# Altium PCB PCB3.PcbDoc
Units mm, origin at the board's own origin, x right, y up, seen from the top; angles counter-clockwise.
Board outline 152.4 x 101.6 mm, 2 copper layers (Top Layer, Bottom Layer); 22 components, 16 nets, 90 pads, 7 vias.
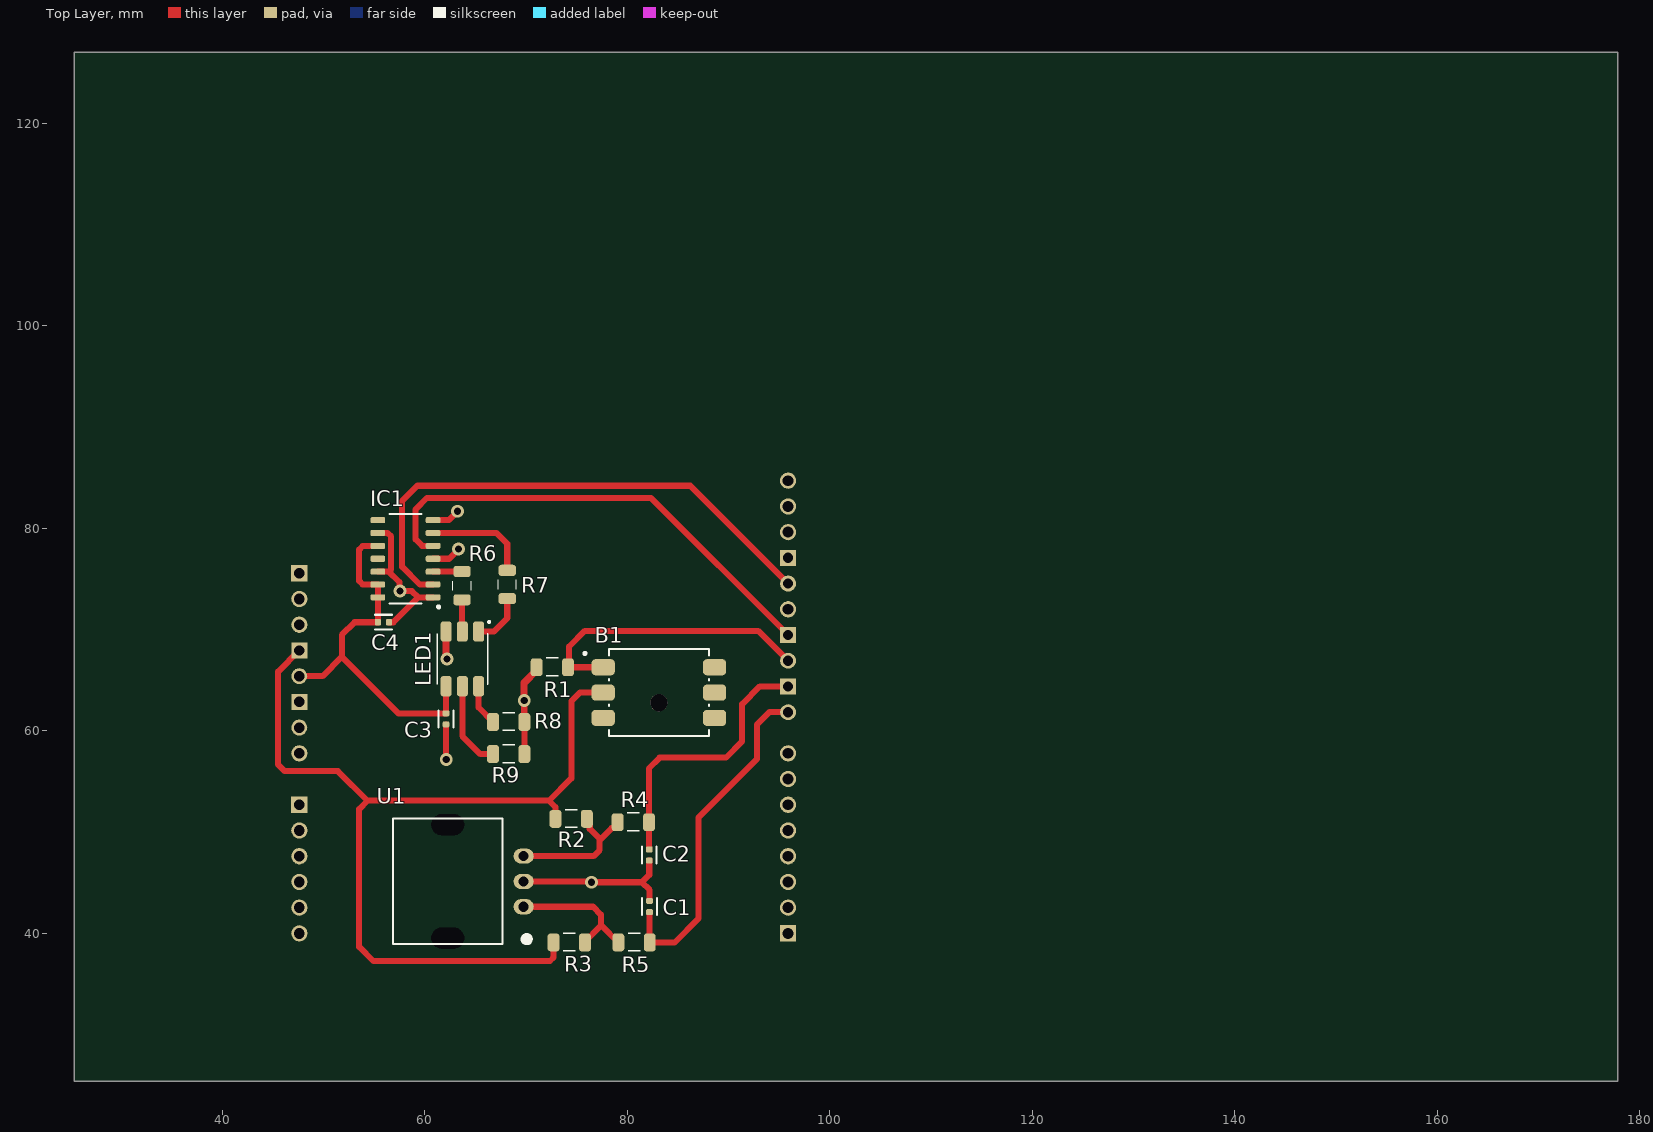
[diagram p0: Top Layer view]
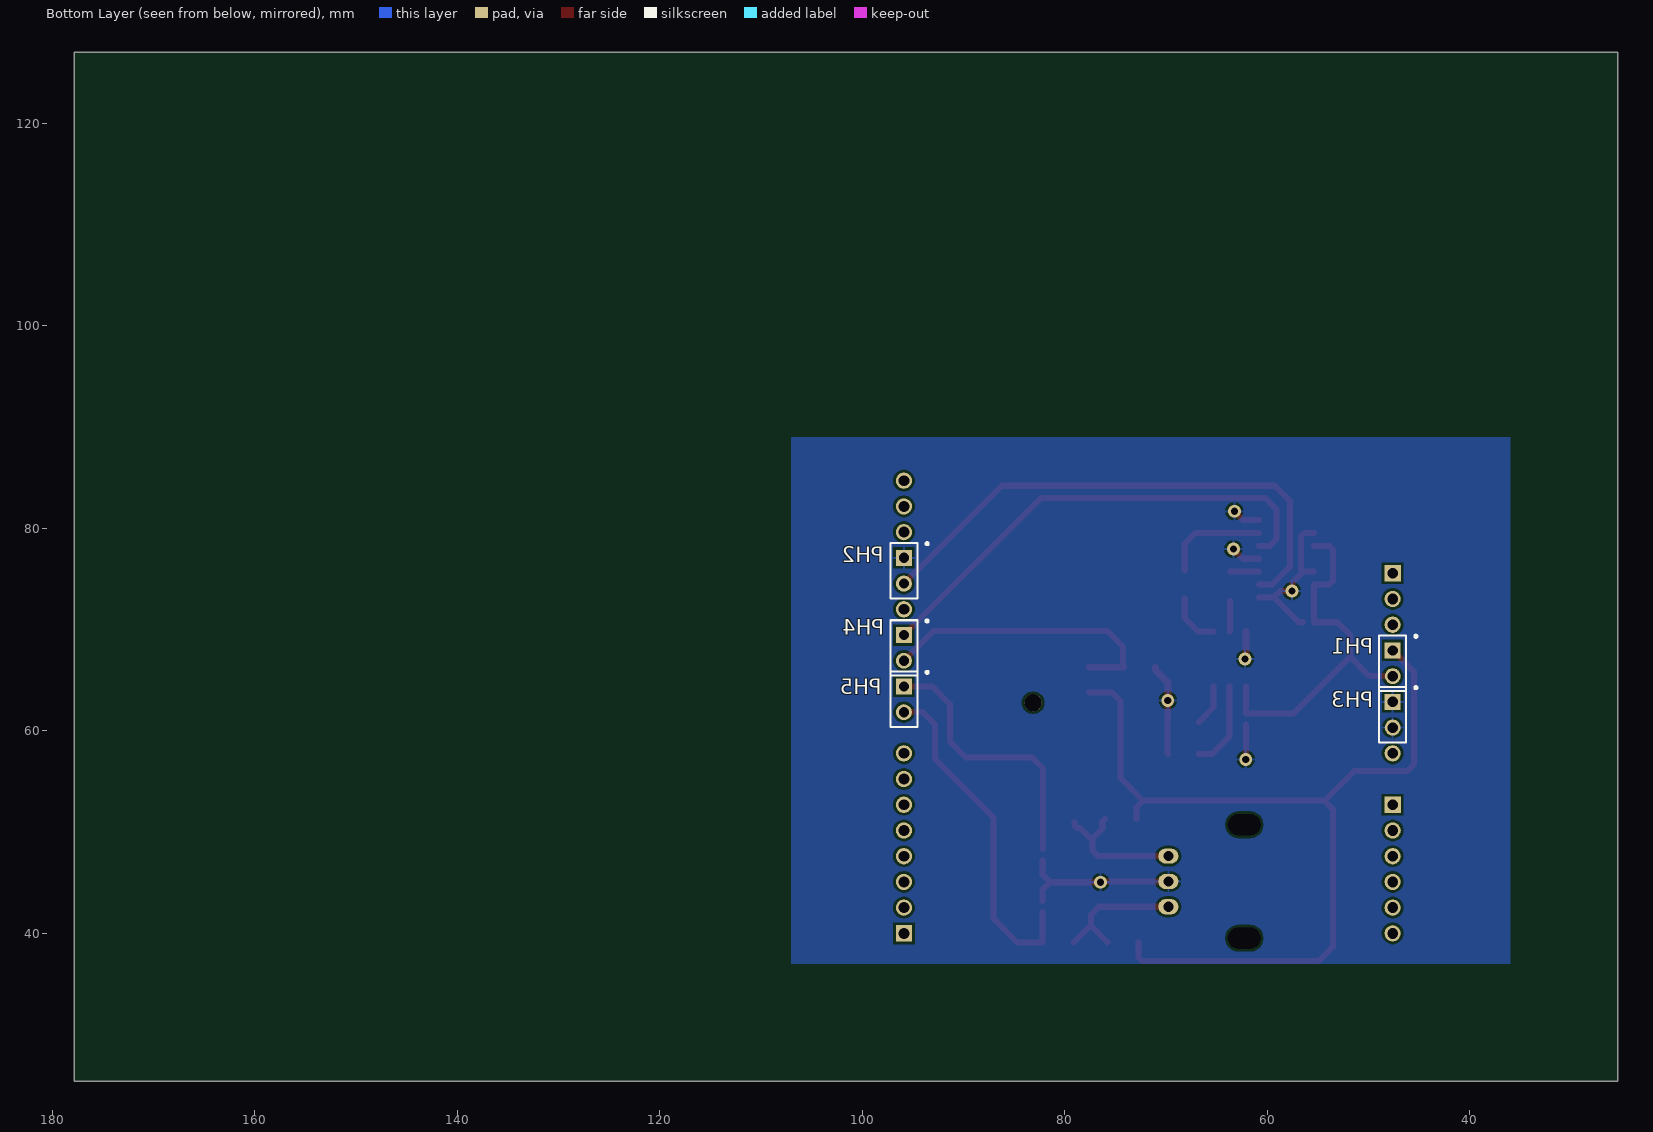
[diagram p1: Bottom Layer view, seen from below]
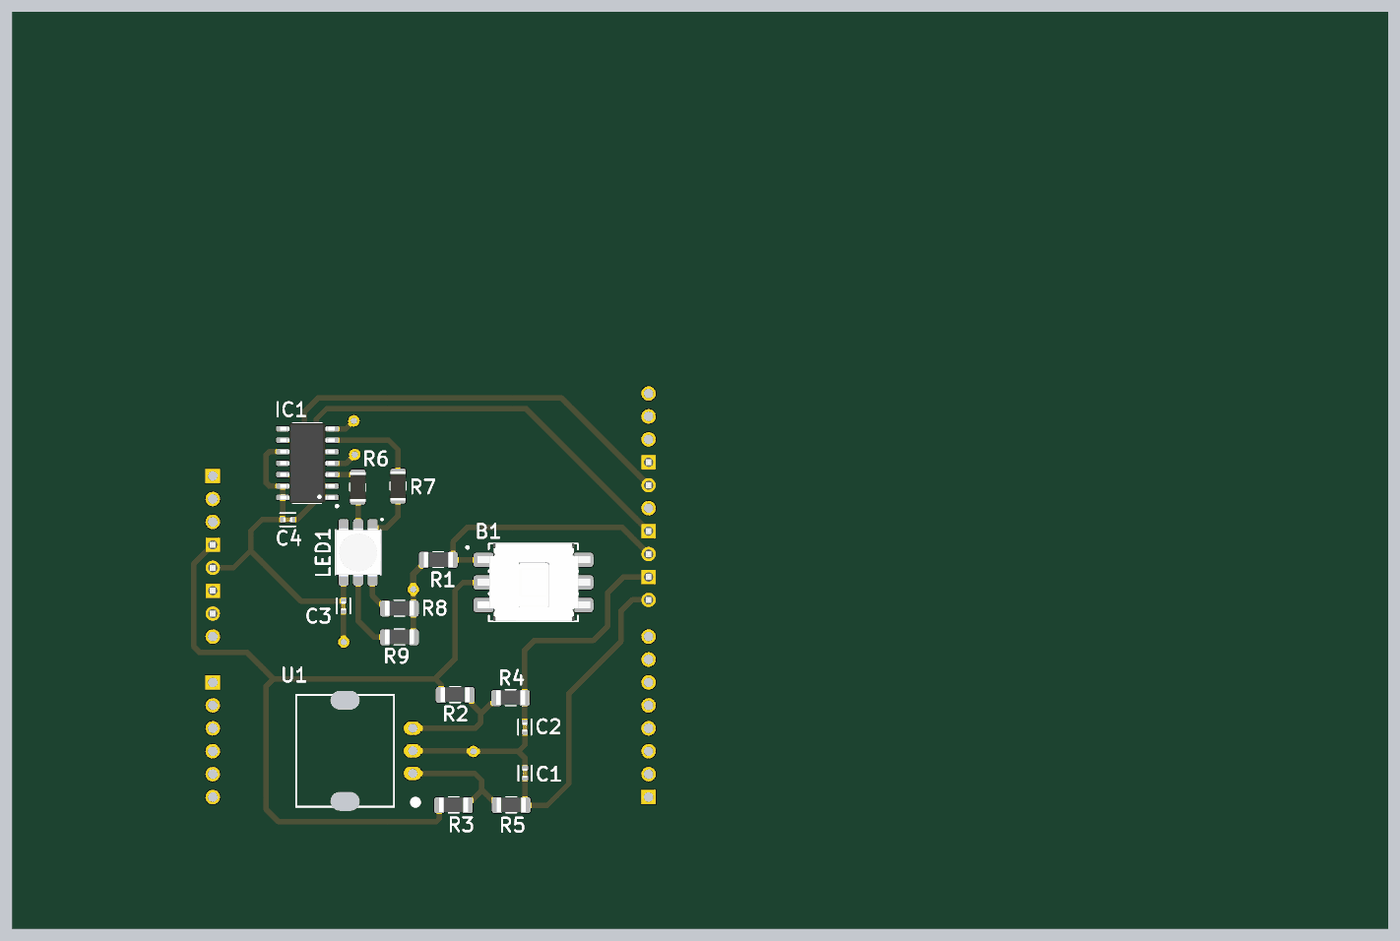
[diagram p2: 3D render of the assembled board from above, using the file's embedded part models]
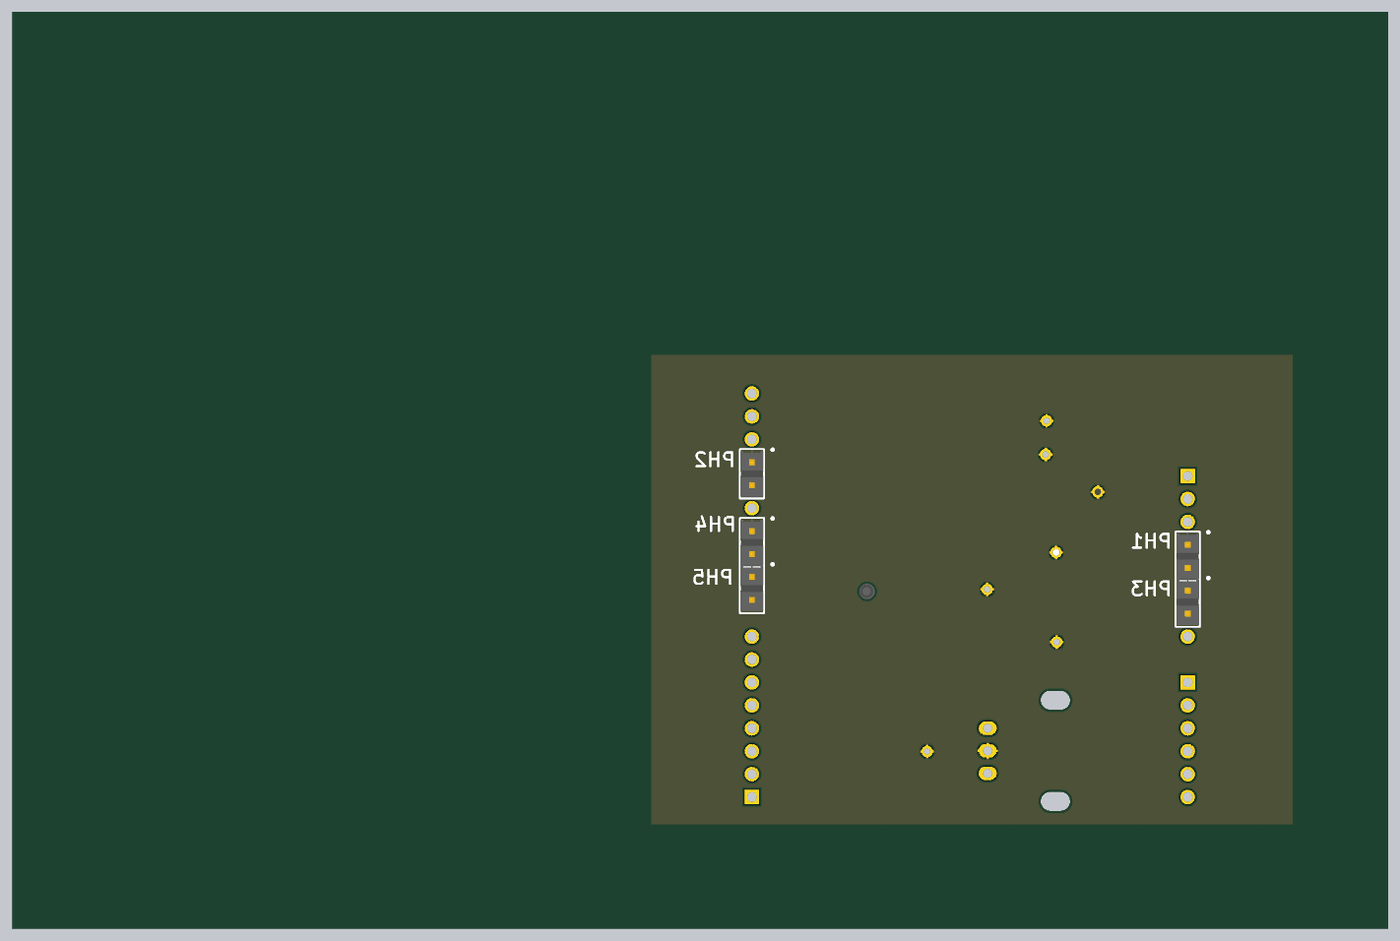
[diagram p3: 3D render of the assembled board from below, using the file's embedded part models]

## Layer stack, top to bottom
Top Solder: solder mask 0.0102, Solder Resist, Dk 3.5
Top Layer: signal copper 0.0356
Dielectric 1: dielectric 0.32, FR-4, Dk 4.8
Bottom Layer: signal copper 0.0356
Bottom Solder: solder mask 0.0102, Solder Resist, Dk 3.5

## Board outline
25.4,25.4 177.8,25.4 177.8,127 25.4,127

## Design rules (kind name [scope] priority, off if disabled: settings)
AssemblyTestPointUsage [All] p1: isadvanced=TRUE
AssemblyTestpoint [All] p1: isadvanced=TRUE testpointundercomponent=TRUE minsize=1.016 maxsize=2.54 preferedsize=1.524 minholesize=0 maxholesize=1.016 preferedholesize=0.813 testpointgrid=0.025 usegrid=TRUE gridtolerance=0 allowsidetop=TRUE allowsidebottom=TRUE
Clearance Clearance_1 [OnMid vs OnMid] p1: gap=0.254 ignorepadtopadclearanceinfootprint=FALSE sourcerule=39 cellrowname=All cellrowtype=0 cellcolname=All cellcoltype=0 innerlayers=TRUE
Clearance Clearance_2 [(ExistsOnLayer('Top Layer') Or ExistsOnLayer('Bottom Layer')) vs (ExistsOnLayer('Top Layer') Or ExistsOnLayer('Bottom Layer'))] p2: gap=0.254 ignorepadtopadclearanceinfootprint=FALSE sourcerule=39 cellrowname=All cellrowtype=0 cellcolname=All cellcoltype=0 outerlayers=TRUE
Clearance [All] p3: gap=0.254 ignorepadtopadclearanceinfootprint=FALSE ismatrix=TRUE
ComponentClearance [All] p1: isadvanced=TRUE gap=0.254 collisioncheckmode=3 verticalgap=0.254 showdistances=FALSE
FabricationTestPointUsage [All] p1: isadvanced=TRUE valid=0 allowmultiple=FALSE
FabricationTestpoint [All] p1: isadvanced=TRUE side=3 testpointundercomponent=TRUE minsize=1.016 maxsize=2.54 preferedsize=1.524 minholesize=0 maxholesize=1.016 preferedholesize=0.813 testpointgrid=0.025 allowsidetop=TRUE allowsidebottom=TRUE usegrid=TRUE gridtolerance=0
FanoutControl Fanout_BGA [IsBGA] p1: isadvanced=TRUE bgadir=Out bgaviamode=Centered fanoutstyle=Auto fanoutdirection=Alternating viagrid=0.025 // Fanout_BGA (Default Rule)
FanoutControl Fanout_LCC [IsLCC] p2: isadvanced=TRUE bgadir=Out bgaviamode=Centered fanoutstyle=Auto fanoutdirection=Alternating viagrid=0.025 // Fanout_LCC (Default Rule)
FanoutControl Fanout_SOIC [IsSOIC] p3: isadvanced=TRUE bgadir=Out bgaviamode=Centered fanoutstyle=Auto fanoutdirection=Alternating viagrid=0.025 // Fanout_SOIC (Default Rule)
FanoutControl Fanout_Small [(CompPinCount < 5)] p4: isadvanced=TRUE bgadir=Out bgaviamode=Centered fanoutstyle=Auto fanoutdirection=OutThenIn viagrid=0.025 // Fanout_Small (Default Rule)
FanoutControl Fanout_Default [All] p5: isadvanced=TRUE bgadir=Out bgaviamode=Centered fanoutstyle=Auto fanoutdirection=Alternating viagrid=0.025 // Fanout_Default (Default Rule)
Height [All] p1: isadvanced=TRUE minheight=0 maxheight=25.4 prefheight=12.7
HoleSize [All] p1: isadvanced=TRUE absolutevalues=TRUE maxlimit=10 minlimit=0.2 maxpercent=80.000 minpercent=20.000
HoleToHoleClearance [All] p1: isadvanced=TRUE gap=0.5 allowstackedmicrovias=TRUE
LayerPairs [All] p1: isadvanced=TRUE enforce=TRUE
MinimumSolderMaskSliver [All] p1: isadvanced=TRUE minsoldermaskwidth=0.2
NetAntennae [All] p1: isadvanced=TRUE netantennaetolerance=0
PasteMaskExpansion [All] p1: isadvanced=TRUE expansion=0
PlaneClearance [All] p1: isadvanced=TRUE clearance=0.508
PlaneConnect [All] p1: isadvanced=TRUE planeconnectstyle=Relief reliefexpansion=0.508 reliefentries=4 reliefconductorwidth=0.254 reliefairgap=0.254
PolygonConnect [All] p1: connectstyle=Relief reliefconductorwidth=0.254 reliefentries=4 polygonreliefangle="90 Angle" airgapwidth=0.254
RoutingCorners [All] p1: isadvanced=TRUE cornerstyle=45-Degree minsetback=2.54 maxsetback=2.54
RoutingPriority [All] p1: isadvanced=TRUE routingpriority=0
RoutingVias [All] p1: holewidth=0.711 width=1.27 viastyle="Through Hole" minholewidth=0.711 minwidth=1.27 maxholewidth=0.711 maxwidth=1.27
ShortCircuit [All] p1: isadvanced=TRUE allowed=FALSE
SilkToSilkClearance [All] p1: isadvanced=TRUE silktosilkclearance=0.2
SilkToSolderMaskClearance [IsPad] p1: isadvanced=TRUE minsilkscreentomaskgap=0.1 clearancetoexposedcopper=TRUE
SolderMaskExpansion [All] p1: isadvanced=TRUE expansion=0.102 istentingtop=FALSE
SupplyNets "Schematic Supply Nets_3" [InNet('+3.3_MCU')] p1: isadvanced=TRUE voltage=0.000
SupplyNets "Schematic Supply Nets_2" [InNet('GND')] p2: isadvanced=TRUE voltage=0.000
SupplyNets "Schematic Supply Nets" [InNet('+5_USB')] p3: isadvanced=TRUE voltage=0.000
UnRoutedNet [All] p1: isadvanced=TRUE
UnpouredPolygon [All] p1: isadvanced=TRUE
Width [All] p1: maxlimit=1 minlimit=0.254 preferedwidth=0.6 minimp=50.000000 maximp=50.000000 favimp=50.000000
4 further rules are at their usual default settings.

## Components (designator, comment, footprint, x,y, rotation, side; value= is the part's Value field where it differs from the comment)
B1 "ESB-33535A" SOIC_Boton 83.125,63.775 r0 top
C1 "GCM155R71H104KE02D" GCM155R71H104KE02D 82.2,42.65 r270 top value=100nF
C2 "GCM155R71H104KE02D" GCM155R71H104KE02D 82.175,47.75 r90 top value=100nF
C3 "GCM155R71H104KE02D" GCM155R71H104KE02D 62.1,61.175 r90 top value=100nF
C4 "GCM155R71H104KE02D" GCM155R71H104KE02D 55.925,70.725 r0 top value=100nF
IC1 "SN74HCT125DR" "SOIC127P600X175_HS-15N - TI" 58.101,76.99 r180 top
LED1 "BL-HBGR32L-3-TRB-8" SOIC_LEDRGB 63.464,67.102 r270 top
PH1 "TSW-102-07-F-S" TSW-102-07-F-S 47.62,66.67 r270 bottom
PH2 "TSW-102-07-F-S" TSW-102-07-F-S 95.88,75.81 r270 bottom
PH3 "TSW-102-07-F-S" TSW-102-07-F-S 47.62,61.59 r270 bottom
PH4 "TSW-102-07-F-S" TSW-102-07-F-S 95.88,68.19 r270 bottom
PH5 "TSW-102-07-F-S" TSW-102-07-F-S 95.88,63.11 r270 bottom
R1 "CR1206-JW-103ELF" Chip-Resistor-10k 72.6,66.275 r180 top value=10kΩ
R2 "CR1206-JW-103ELF" Chip-Resistor-10k 74.46,51.31 r180 top value=10kΩ
R3 "CR1206-JW-103ELF" Chip-Resistor-10k 74.275,39.1 r180 top value=10kΩ
R4 "CR1206-JW-103ELF" Chip-Resistor-10k 80.6,50.975 r180 top value=10kΩ
R5 "CR1206-JW-103ELF" Chip-Resistor-10k 80.675,39.1 r180 top value=10kΩ
R6 "500Ω" "R1206 - YAGEO" 63.685,74.335 r90 top
R7 "500Ω" "R1206 - YAGEO" 68.15,74.45 r90 top
R8 "CR1206-JW-103ELF" Chip-Resistor-10k 68.29,60.879 r180 top value=10kΩ
R9 "CR1206-JW-103ELF" Chip-Resistor-10k 68.29,57.704 r180 top value=10kΩ
U1 "4809-EC12E24404A6-ND" "Tray - ALPS Alpine" 62.272,45.129 r90 top

## Footprints (in the part's own frame and the unit in brackets; to place one, negate y for a bottom-side part, rotate by r counter-clockwise, add the part's x,y. Pads: shape width x height; smd on the part's side, far side on the other; paste and mask are expansions set on the pad)
Chip-Resistor-10k [mm]
  rrect50% 1.17x1.77 smd: 1(-1.55,0) 2(1.55,0)
  silkscreen extent -0.59,-0.92 0.59,0.84, body extent -1.6,-0.84 1.6,0.76, height 0.75
GCM155R71H104KE02D [mm]
  rrect50% 0.6x0.672 smd: 1(-0.55,0) 2(0.55,0)
  silkscreen extent -0.84,-0.74 0.84,0.74, body extent -1.04,-0.54 1.04,0.54, height 0.25
"R1206 - YAGEO" [mm]
  rrect50% 1.1x1.7 smd: 1(-1.4,0) 2(1.4,0)
  silkscreen extent -0.45,-0.9 0.45,0.9, body extent -1.6,-0.85 1.6,0.85, height 0.65
"SOIC127P600X175_HS-15N - TI" [mm] "SOIC, 14-Leads, Body 8,65x3,90mm, Pitch 1,27mm, Thermal Pad 7,00x3,00mm, IPC Medium Density"
  rrect50% 1.45x0.6 smd: 1(-2.725,3.81) 2(-2.725,2.54) 3(-2.725,1.27) 4(-2.725,0) 5(-2.725,-1.27) 6(-2.725,-2.54) 7(-2.725,-3.81) 8(2.725,-3.81) 9(2.725,-2.54) 10(2.725,-1.27) 11(2.725,0) 12(2.725,1.27) 13(2.725,2.54) 14(2.725,3.81)
  silkscreen extent -3.4,-4.4 1.6,4.87, body extent -3,-4.4 3,4.4, height 1.75
SOIC_Boton [mm]
  rrect50% 2.3x1.6 smd: 1(-5.5,2.5) 2(-5.5,0) 3(-5.5,-2.5) 4(5.5,-2.5) 5(5.5,0) 6(5.5,2.5)
  round 1.7 hole 1.7 unplated paste-2539.97 mask+0: ""(0,-1)
  silkscreen extent -7.42,-4.3 4.92,4.3, body extent -6.7,-4.37 6.8,4.43, height 0.25
SOIC_LEDRGB [mm]
  rrect50% 2x1.1 smd: 1(-2.7,1.854) 2(-2.7,0.254) 3(-2.7,-1.346) 4(2.7,-1.346) 5(2.7,0.254) 6(2.7,1.854)
  silkscreen extent -3.75,-2.25 2.5,3, body extent -2.7,-2.25 2.7,2.75, height 1.5
"Tray - ALPS Alpine" [mm]
  oval 1.5x2 hole 1: 1(-2.5,-7.5) 2(0,-7.5) 3(2.5,-7.5)
  round 1.7 hole 2.1 slot 3.25 at 90 deg unplated paste-2539.97 mask+0: ""(-5.6,0) ""(5.6,0)
  silkscreen extent -6.2,-8.1 6.2,5.43, body extent -6.2,-6.6 6.2,6.6, height 5
TSW-102-07-F-S [mm]
  rect 1.57x1.57 hole 1.02 paste-2539.97 mask+0: 1(-1.27,0)
  round 1.57 hole 1.02 paste-2539.97 mask+0: 2(1.27,0)
  silkscreen extent -2.79,-1.34 2.73,2.41, body extent -2.67,-1.27 2.54,1.27, height 8.71

## Part data
B1: "Pushbutton Switch, DPDT, Momentary, 0.2A, 14VDC, Solder Terminal, Surface Mount-straight", Case/Package=SMD/SMT, Contact Current Rating=200mA, Manufacturer=Panasonic, Max Operating Temperature=70°C, Max Voltage Rating (DC)=14V, Min Operating Temperature=-10°C, Operating Force=4N, Supplier Part Number 1=P15877SCT-ND, Actuator Length=6.5024mm, Category="Pushbutton Switches", ComponentLink1Description=https://datasheet.octopart.com:443/ESB33535A-Panasonic-datasheet-93783763.pdf?src-supplier=IHS, ComponentLink1URL=https://datasheet.octopart.com:443/ESB33535A-Panasonic-datasheet-93783763.pdf?src-supplier=IHS, ComponentLink2Description=https://datasheet.octopart.com:443/ESB-33535A-Panasonic-datasheet-138738884.pdf?src-supplier=Electro+Sonic, ComponentLink2URL=https://datasheet.octopart.com:443/ESB-33535A-Panasonic-datasheet-138738884.pdf?src-supplier=Electro+Sonic, Electrical Life=10kcycles, Height=6mm, Length=9.85mm, Lifecycle Status=Production, Manufacturer Part Number=ESB-33535A, Max Current Rating=200mA, Mounting Technology="Surface Mount", Packaging="Tape & Reel", Pricing="300=1,46613, 600=1,43739, 1200=1,41701, 2400=1,39721, 4800=1,3745 (USD)", Radiation Hardening=No, RoHS=Compliant, Schedule B="8536509030, 8536509030|8536509030|8536509030|8536509030|8536509030", Stock=5400, Supplier=Avnet, Supplier 1=DigiKey, Supplier Part Number=ESB-33535A, Termination=Solder, Throw Configuration=DPDT, Voltage Rating (DC)=14V
C1 C2 C3 C4: "50V 100nF X7R ±10% 0402 Multilayer Ceramic Capacitors MLCC - SMD/SMT ROHS", .Value=100nF, .Voltage Rating (DC)=50V, Case Code (Imperial)=0402, Case Code (Metric)=1005, Dielectric=X7R, Dielectric Material=Ceramic, Manufacturer=Murata, Manufacturer Lifecycle Status="IN PRODUCTION", Max Operating Temperature=125°C, Min Operating Temperature=-55°C, Ratings=AEC-Q200, Supplier Part Number 1=490-10672-6-ND, Tolerance=10%, Case/Package=0402, Category="Ceramic Capacitors", ComponentLink1Description=https://datasheet.octopart.com:443/GCM155R71H104KE02D-Murata-datasheet-149522465.pdf?src-supplier=Farnell, ComponentLink1URL=https://datasheet.octopart.com:443/GCM155R71H104KE02D-Murata-datasheet-149522465.pdf?src-supplier=Farnell, ComponentLink2Description=https://datasheet.octopart.com:443/GCM155R71H104KE02D-Murata-datasheet-66077033.pdf?src-supplier=element14+APAC, ComponentLink2URL=https://datasheet.octopart.com:443/GCM155R71H104KE02D-Murata-datasheet-66077033.pdf?src-supplier=element14+APAC, ComponentLink3Description=https://datasheet.octopart.com:443/GCM155R71H104KE02D-Murata-datasheet-165579661.pdf?src-supplier=TME, ComponentLink3URL=https://datasheet.octopart.com:443/GCM155R71H104KE02D-Murata-datasheet-165579661.pdf?src-supplier=TME, ComponentLink4Description=https://datasheet.octopart.com:443/GCM155R71H104KE02D-Murata-datasheet-141266224.pdf?src-supplier=Ciiva, ComponentLink4URL=https://datasheet.octopart.com:443/GCM155R71H104KE02D-Murata-datasheet-141266224.pdf?src-supplier=Ciiva, ComponentLink5Description=https://datasheet.octopart.com:443/GCM155R71H104KE02D-Murata-datasheet-140656751.pdf?src-supplier=Ciiva, ComponentLink5URL=https://datasheet.octopart.com:443/GCM155R71H104KE02D-Murata-datasheet-140656751.pdf?src-supplier=Ciiva, ComponentLink6Description=https://datasheet.octopart.com:443/GCM155R71H104KE02D-Murata-datasheet-138716456.pdf?src-supplier=Ciiva, ComponentLink6URL=https://datasheet.octopart.com:443/GCM155R71H104KE02D-Murata-datasheet-138716456.pdf?src-supplier=Ciiva, ComponentLink7Description=https://datasheet.octopart.com:443/GCM155R71H104KE02D-Murata-datasheet-12524712.pdf?src-supplier=Future+Electronics, ComponentLink7URL=https://datasheet.octopart.com:443/GCM155R71H104KE02D-Murata-datasheet-12524712.pdf?src-supplier=Future+Electronics, ComponentLink8Description=http://sigma.octopart.com:80/reach_statement/Murata-company-16.pdf?src-supplier=Compliance+Statements, ComponentLink8URL=http://sigma.octopart.com:80/reach_statement/Murata-company-16.pdf?src-supplier=Compliance+Statements, Height=500µm, Lead Free="Lead Free", Length=1mm, Lifecycle Status=Production, Manufacturer Part Number=GCM155R71H104KE02D, Material=Ceramic, Mounting Technology="Surface Mount", Number of Terminals=2, Pricing="10000=0,00604, 20000=0,00601 (USD)", REACH SVHC=Yes, RoHS=Compliant, Schedule B="8532240020, 8532240020|8532240020, 8532240020|8532240020|8532240020, 8532240020|8532240020|8532240020|8532240020", Stock=8220000, Supplier=Avnet, Supplier 1=DigiKey, Supplier Part Number=GCM155R71H104KE02D, Termination=SMD/SMT, Voltage Rating=50V, Voltage Rating (DC)=50V, Weight=6.010099mg, Width=500µm
IC1: "Buffer/Line Driver 4-CH Non-Inverting 3-ST CMOS 14-Pin SOIC T/R / IC BUS BUFF TRI-ST QD 14SOIC", Ambient Temperature Range High=85°C, Case/Package=SOIC, High Level Output Current=-6mA, Low Level Output Current=6mA, Manufacturer="Texas Instruments", Manufacturer Lifecycle Status=ACTIVE, Max Supply Voltage=5.5V, Min Operating Temperature=-40°C, Min Supply Voltage=4.5V, Nominal Supply Current=8µA, Operating Supply Voltage=5V, Supplier Part Number=296-1206-6-ND, Supplier Part Number 1=296-1206-1-ND, Category="Buffers, Drivers and Transceivers", ComponentLink1Description=https://sigma.octopart.com:443/182471030/technical_drawing/Texas-Instruments-SN74HCT125DR.pdf?src-supplier=Texas+Instruments, ComponentLink1URL=https://sigma.octopart.com:443/182471030/technical_drawing/Texas-Instruments-SN74HCT125DR.pdf?src-supplier=Texas+Instruments, ComponentLink2Description=https://octopart.com:443/opatz8j6/c1?t=kHjRTchamf1OEgcfGdw2KSUhwcpvAKIIc-FB5UHfXFvi1I-d_M1T4R10sj4ifHYz9TGNxLSUoWvIx3SI7rvC9uNSW-SqrDIJNlv8Qi0TmNa75oPoh_peB02lt99knWhhM93-ly3GiWOK9yQWYH3AEwBf5hNp6Gt2W6FXe98KXHBOttL1tX1EWPskv1yBnwYgmAirSOxf7aB0EHO2wQ5lloEzqyiVMuVQecV2n3eHBcjfYdHECec4niyiw3ZzGRWDfKyZzV94Ji-xNpTZfWKfZGH4cl8FZzb-4I3xggn-kiOsM3CTV17eBnzS-uHaZHrzlT18rfC2GREHSFSZiIHnrB4Luqi8FPpUJsgor3JQrJkpNEyuNZHLlpbV8UFZZut-UStbLh2o&src-supplier=Texas+Instruments, ComponentLink2URL=https://octopart.com:443/opatz8j6/c1?t=kHjRTchamf1OEgcfGdw2KSUhwcpvAKIIc-FB5UHfXFvi1I-d_M1T4R10sj4ifHYz9TGNxLSUoWvIx3SI7rvC9uNSW-SqrDIJNlv8Qi0TmNa75oPoh_peB02lt99knWhhM93-ly3GiWOK9yQWYH3AEwBf5hNp6Gt2W6FXe98KXHBOttL1tX1EWPskv1yBnwYgmAirSOxf7aB0EHO2wQ5lloEzqyiVMuVQecV2n3eHBcjfYdHECec4niyiw3ZzGRWDfKyZzV94Ji-xNpTZfWKfZGH4cl8FZzb-4I3xggn-kiOsM3CTV17eBnzS-uHaZHrzlT18rfC2GREHSFSZiIHnrB4Luqi8FPpUJsgor3JQrJkpNEyuNZHLlpbV8UFZZut-UStbLh2o&src-supplier=Texas+Instruments, ComponentLink3Description=https://datasheet.octopart.com:443/SN74HCT125DR-Texas-Instruments-datasheet-27379623.pdf?src-supplier=Texas+Instruments, ComponentLink3URL=https://datasheet.octopart.com:443/SN74HCT125DR-Texas-Instruments-datasheet-27379623.pdf?src-supplier=Texas+Instruments, ComponentLink4Description=https://datasheet.octopart.com:443/SN74HCT125DR-Texas-Instruments-datasheet-10254676.pdf?src-supplier=Texas+Instruments, ComponentLink4URL=https://datasheet.octopart.com:443/SN74HCT125DR-Texas-Instruments-datasheet-10254676.pdf?src-supplier=Texas+Instruments, ComponentLink5Description=https://sigma.octopart.com:443/49249646/technical_drawing/Texas-Instruments-SN74HCT125DR.pdf?src-supplier=Texas+Instruments, ComponentLink5URL=https://sigma.octopart.com:443/49249646/technical_drawing/Texas-Instruments-SN74HCT125DR.pdf?src-supplier=Texas+Instruments, ComponentLink6Description=https://datasheet.octopart.com:443/SN74HCT125DR-Texas-Instruments-datasheet-152071.pdf?src-supplier=Texas+Instruments, ComponentLink6URL=https://datasheet.octopart.com:443/SN74HCT125DR-Texas-Instruments-datasheet-152071.pdf?src-supplier=Texas+Instruments, ComponentLink7Description=https://datasheet.octopart.com:443/SN74HCT125DR-Texas-Instruments-datasheet-148780591.pdf?src-supplier=Upverter, ComponentLink7URL=https://datasheet.octopart.com:443/SN74HCT125DR-Texas-Instruments-datasheet-148780591.pdf?src-supplier=Upverter, ComponentLink8Description=https://datasheet.octopart.com:443/SN74HCT125DR-Texas-Instruments-datasheet-164417431.pdf?src-supplier=SHENGYU+ELECTRONICS, ComponentLink8URL=https://datasheet.octopart.com:443/SN74HCT125DR-Texas-Instruments-datasheet-164417431.pdf?src-supplier=SHENGYU+ELECTRONICS, ComponentLink9Description=https://datasheet.octopart.com:443/SN74HCT125DR-Texas-Instruments-datasheet-14145064.pdf?src-supplier=iiiC, ComponentLink9URL=https://datasheet.octopart.com:443/SN74HCT125DR-Texas-Instruments-datasheet-14145064.pdf?src-supplier=iiiC, ComponentLink10Description=https://datasheet.octopart.com:443/SN74HCT125DR-Texas-Instruments-datasheet-11793522.pdf?src-supplier=Arrow+Electronics, ComponentLink10URL=https://datasheet.octopart.com:443/SN74HCT125DR-Texas-Instruments-datasheet-11793522.pdf?src-supplier=Arrow+Electronics, ComponentLink11Description=https://datasheet.octopart.com:443/SN74HCT125DR-Texas-Instruments-datasheet-8637610.pdf?src-supplier=Verical, ComponentLink11URL=https://datasheet.octopart.com:443/SN74HCT125DR-Texas-Instruments-datasheet-8637610.pdf?src-supplier=Verical, ComponentLink12Description=https://datasheet.octopart.com:443/SN74HCT125DR-Texas-Instruments-datasheet-5321032.pdf?src-supplier=Verical, ComponentLink12URL=https://datasheet.octopart.com:443/SN74HCT125DR-Texas-Instruments-datasheet-5321032.pdf?src-supplier=Verical, ComponentLink13Description=https://datasheet.octopart.com:443/SN74HCT125DR-Texas-Instruments-datasheet-10451259.pdf?src-supplier=Jameco, ComponentLink13URL=https://datasheet.octopart.com:443/SN74HCT125DR-Texas-Instruments-datasheet-10451259.pdf?src-supplier=Jameco, ComponentLink14Description=https://datasheet.octopart.com:443/SN74HCT125DR-Texas-Instruments-datasheet-58090.pdf?src-supplier=DigiKey, ComponentLink14URL=https://datasheet.octopart.com:443/SN74HCT125DR-Texas-Instruments-datasheet-58090.pdf?src-supplier=DigiKey, ComponentLink15Description=https://datasheet.octopart.com:443/SN74HCT125DR-Texas-Instruments-datasheet-114889.pdf?src-supplier=Sierra+IC, ComponentLink15URL=https://datasheet.octopart.com:443/SN74HCT125DR-Texas-Instruments-datasheet-114889.pdf?src-supplier=Sierra+IC, ComponentLink16Description=http://sigma.octopart.com:80/conflict_mineral_statement/Texas-Instruments-company-63.pdf?src-supplier=Compliance+Statements, ComponentLink16URL=http://sigma.octopart.com:80/conflict_mineral_statement/Texas-Instruments-company-63.pdf?src-supplier=Compliance+Statements, ComponentLink17Description=http://sigma.octopart.com:80/reach_statement/Texas-Instruments-company-64.pdf?src-supplier=Compliance+Statements, ComponentLink17URL=http://sigma.octopart.com:80/reach_statement/Texas-Instruments-company-64.pdf?src-supplier=Compliance+Statements, Contact Plating=Gold, Height=0m, Lead Free="Lead Free", Length=8.65mm, Lifecycle Status=Production, Logic Function="Buffer, Inverting", Manufacturer Part Number=SN74HCT125DR, Max Operating Temperature=85°C, Mounting Technology="Surface Mount", Number of Bits=4, Number of Bits per Element=1, Number of Channels=4, Number of Circuits=4, Number of Elements=4, Number of Input Lines=4, Number of Inputs=2, Number of Output Lines=4, Number of Outputs=4, Packaging="Tape & Reel", Pins=14, Polarity=Non-Inverting, Pricing="1=0,36, 10=0,246, 25=0,2188, 100=0,1888, 250=0,17452, 500=0,16586, 1000=0,15874 (USD)", Propagation Delay=33ns, Quiescent Current=8µA, Radiation Hardening=No, REACH SVHC=No, RoHS=Compliant, Schedule B="8542390000, 8542390000|8542390000|8542390000|8542390000|8542390000", Stock=5749, Supplier=DigiKey, Supplier 1=DigiKey, Thickness=1.58mm, Turn-On Delay Time=36ns, Width=3.91mm
LED1: "Address Led Discrete Serial Rgb", Manufacturer="American Bright", Supplier Part Number=2007-BL-HBGR32L-3-TRB-8CT-ND, Category=Optoelectronics, ComponentLink1Description=https://datasheet.octopart.com:443/BL-HBGR32L-3-TRB-8-American-Bright-datasheet-182526079.pdf?src-supplier=Future+Electronics, ComponentLink1URL=https://datasheet.octopart.com:443/BL-HBGR32L-3-TRB-8-American-Bright-datasheet-182526079.pdf?src-supplier=Future+Electronics, Manufacturer Part Number=BL-HBGR32L-3-TRB-8, Pricing="1=1,57, 10=1,113, 100=0,8396, 500=0,7184, 1000=0,67881, 2000=0,64526, 3000=0,62806, 5000=0,60866, 7000=0,59712, 10000=0,58587 (USD)", RoHS=Compliant, Stock=52650, Supplier=DigiKey, Supplier 1=DigiKey, Supplier Part Number 1=2007-BL-HBGR32L-3-TRB-8CT-ND
PH1 PH2 PH3 PH4 PH5: "2 Positions Header, Unshrouded Connector 0.100\" (2.54mm) Through Hole Gold", Color=Black, Manufacturer=Samtec, Manufacturer Lifecycle Status=PRODUCTION, Max Current Rating=7.6A, Max Operating Temperature=125°C, Max Voltage Rating (AC)=550V, Min Operating Temperature=-55°C, Supplier Part Number 1=SAM10844-ND, Category="Headers and Wire Housings", ComponentLink1Description=https://datasheet.octopart.com:443/TSW-102-07-F-S-Samtec-datasheet-142046629.pdf?src-supplier=Upverter, ComponentLink1URL=https://datasheet.octopart.com:443/TSW-102-07-F-S-Samtec-datasheet-142046629.pdf?src-supplier=Upverter, ComponentLink2Description=https://sigma.octopart.com:443/14433679/technical_drawing/Samtec-TSW-102-07-F-S.pdf?src-supplier=Upverter, ComponentLink2URL=https://sigma.octopart.com:443/14433679/technical_drawing/Samtec-TSW-102-07-F-S.pdf?src-supplier=Upverter, ComponentLink3Description=https://datasheet.octopart.com:443/TSW-102-07-F-S-Samtec-datasheet-97325576.pdf?src-supplier=Sager+Electronics, ComponentLink3URL=https://datasheet.octopart.com:443/TSW-102-07-F-S-Samtec-datasheet-97325576.pdf?src-supplier=Sager+Electronics, ComponentLink4Description=https://datasheet.octopart.com:443/TSW-102-07-F-S-Samtec-datasheet-151455181.pdf?src-supplier=Sager+Electronics, ComponentLink4URL=https://datasheet.octopart.com:443/TSW-102-07-F-S-Samtec-datasheet-151455181.pdf?src-supplier=Sager+Electronics, ComponentLink5Description=https://sigma.octopart.com:443/97325577/technical_drawing/Samtec-TSW-102-07-F-S.pdf?src-supplier=Samtec, ComponentLink5URL=https://sigma.octopart.com:443/97325577/technical_drawing/Samtec-TSW-102-07-F-S.pdf?src-supplier=Samtec, ComponentLink6Description=https://datasheet.octopart.com:443/TSW-102-07-F-S-Samtec-datasheet-62107121.pdf?src-supplier=Newark, ComponentLink6URL=https://datasheet.octopart.com:443/TSW-102-07-F-S-Samtec-datasheet-62107121.pdf?src-supplier=Newark, ComponentLink7Description=https://datasheet.octopart.com:443/TSW-102-07-F-S-Samtec-datasheet-164324425.pdf?src-supplier=Newark, ComponentLink7URL=https://datasheet.octopart.com:443/TSW-102-07-F-S-Samtec-datasheet-164324425.pdf?src-supplier=Newark, ComponentLink8Description=https://datasheet.octopart.com:443/TSW-102-07-F-S-Samtec-datasheet-11047283.pdf?src-supplier=Newark, ComponentLink8URL=https://datasheet.octopart.com:443/TSW-102-07-F-S-Samtec-datasheet-11047283.pdf?src-supplier=Newark, ComponentLink9Description=https://datasheet.octopart.com:443/TSW-102-07-F-S-Samtec-datasheet-136646178.pdf?src-supplier=Master+Electronics, ComponentLink9URL=https://datasheet.octopart.com:443/TSW-102-07-F-S-Samtec-datasheet-136646178.pdf?src-supplier=Master+Electronics, ComponentLink10Description=https://datasheet.octopart.com:443/TSW-102-07-F-S-Samtec-datasheet-116615235.pdf?src-supplier=Electro+Sonic, ComponentLink10URL=https://datasheet.octopart.com:443/TSW-102-07-F-S-Samtec-datasheet-116615235.pdf?src-supplier=Electro+Sonic, ComponentLink11Description=https://datasheet.octopart.com:443/TSW-102-07-F-S-Samtec-datasheet-182948906.pdf?src-supplier=JRH+Electronics, ComponentLink11URL=https://datasheet.octopart.com:443/TSW-102-07-F-S-Samtec-datasheet-182948906.pdf?src-supplier=JRH+Electronics, ComponentLink12Description=https://datasheet.octopart.com:443/TSW-102-07-F-S-Samtec-datasheet-160657603.pdf?src-supplier=Toby+Electronics, ComponentLink12URL=https://datasheet.octopart.com:443/TSW-102-07-F-S-Samtec-datasheet-160657603.pdf?src-supplier=Toby+Electronics, ComponentLink13Description=https://datasheet.octopart.com:443/TSW-102-07-F-S-Samtec-datasheet-116539033.pdf?src-supplier=Toby+Electronics, ComponentLink13URL=https://datasheet.octopart.com:443/TSW-102-07-F-S-Samtec-datasheet-116539033.pdf?src-supplier=Toby+Electronics, ComponentLink14Description=https://datasheet.octopart.com:443/TSW-102-07-F-S-Samtec-datasheet-116536310.pdf?src-supplier=Toby+Electronics, ComponentLink14URL=https://datasheet.octopart.com:443/TSW-102-07-F-S-Samtec-datasheet-116536310.pdf?src-supplier=Toby+Electronics, ComponentLink15Description=https://datasheet.octopart.com/TSW-102-07-F-S-Samtec-datasheet-86818365.pdf, ComponentLink15URL=https://datasheet.octopart.com/TSW-102-07-F-S-Samtec-datasheet-86818365.pdf, Connector Type="Male Pin", Contact Material="Gold, Nickel", Contact Mating Length=5.842mm, Contact Plating=Gold, Depth=2.54mm, Gender=Male, Height=8.71mm, Housing Color=Black, Housing Material=Polyester, Lead Pitch=2.54mm, Lifecycle Status=Production, Manufacturer Part Number=TSW-102-07-F-S, Mounting Technology="Through Hole", Number of Contacts=2, Number of Positions=2, Number of Rows=1, Orientation=Straight, Pins=2, Pitch=2.54mm, Pricing="1=0,10388, 2=0,10335, 4=0,10282, 8=0,10229, 16=0,0768 (USD)", Radiation Hardening=No, REACH SVHC=No, RoHS=Compliant, Stock=10000, Supplier=Avnet, Supplier 1=DigiKey, Supplier Part Number=TSW-102-07-F-S, Termination=Solder, Voltage Rating=550V
R1 R2 R3 R4 R5 R8 R9: "SMD Chip Resistor, 10 kOhm, ± 5%, 250 mW, 1206 [3216 Metric], Thick Film, General Purpose", .Tolerance=5%, .Value=10kΩ, Case Code (Imperial)=1206, Case Code (Metric)=3216, Manufacturer=Vishay, Manufacturer Part Number=CRCW120610K0JNEA, Max Operating Temperature=155°C, Max Power Dissipation=250mW, Min Operating Temperature=-55°C, Supplier Part Number 1=CR1206-JW-103ELFCT-ND, Temperature Coefficient=200ppm/°C, Voltage Rating=200V, Case/Package=1206, Category="Chip SMD Resistors", China RoHS=Non-Compliant, ComponentLink1Description=https://datasheet.octopart.com:443/CRCW120610K0JNEA-Vishay-datasheet-175423584.pdf?src-supplier=IHS, ComponentLink1URL=https://datasheet.octopart.com:443/CRCW120610K0JNEA-Vishay-datasheet-175423584.pdf?src-supplier=IHS, ComponentLink2Description=https://datasheet.octopart.com:443/CRCW120610K0JNEA-Vishay-datasheet-83961561.pdf?src-supplier=Newark, ComponentLink2URL=https://datasheet.octopart.com:443/CRCW120610K0JNEA-Vishay-datasheet-83961561.pdf?src-supplier=Newark, ComponentLink3Description=https://datasheet.octopart.com:443/CRCW120610K0JNEA-Vishay-datasheet-41302739.pdf?src-supplier=Newark, ComponentLink3URL=https://datasheet.octopart.com:443/CRCW120610K0JNEA-Vishay-datasheet-41302739.pdf?src-supplier=Newark, ComponentLink4Description=https://datasheet.octopart.com:443/CRCW120610K0JNEA-Vishay-datasheet-21268114.pdf?src-supplier=Newark, ComponentLink4URL=https://datasheet.octopart.com:443/CRCW120610K0JNEA-Vishay-datasheet-21268114.pdf?src-supplier=Newark, ComponentLink5Description=https://datasheet.octopart.com:443/CRCW120610K0JNEA-Vishay-datasheet-21226360.pdf?src-supplier=Newark, ComponentLink5URL=https://datasheet.octopart.com:443/CRCW120610K0JNEA-Vishay-datasheet-21226360.pdf?src-supplier=Newark, ComponentLink6Description=https://datasheet.octopart.com:443/CRCW120610K0JNEA-Vishay-datasheet-62317937.pdf?src-supplier=element14+APAC, ComponentLink6URL=https://datasheet.octopart.com:443/CRCW120610K0JNEA-Vishay-datasheet-62317937.pdf?src-supplier=element14+APAC, ComponentLink7Description=https://datasheet.octopart.com:443/CRCW120610K0JNEA-Vishay-datasheet-66077789.pdf?src-supplier=element14+APAC, ComponentLink7URL=https://datasheet.octopart.com:443/CRCW120610K0JNEA-Vishay-datasheet-66077789.pdf?src-supplier=element14+APAC, ComponentLink8Description=https://datasheet.octopart.com:443/CRCW120610K0JNEA-Vishay-datasheet-14722531.pdf?src-supplier=element14+APAC, ComponentLink8URL=https://datasheet.octopart.com:443/CRCW120610K0JNEA-Vishay-datasheet-14722531.pdf?src-supplier=element14+APAC, ComponentLink9Description=https://datasheet.octopart.com:443/CRCW120610K0JNEA-Vishay-Dale-datasheet-41169522.pdf?src-supplier=element14+APAC, ComponentLink9URL=https://datasheet.octopart.com:443/CRCW120610K0JNEA-Vishay-Dale-datasheet-41169522.pdf?src-supplier=element14+APAC, ComponentLink10Description=https://datasheet.octopart.com:443/CRCW120610K0JNEA-Vishay-datasheet-41195454.pdf?src-supplier=Farnell, ComponentLink10URL=https://datasheet.octopart.com:443/CRCW120610K0JNEA-Vishay-datasheet-41195454.pdf?src-supplier=Farnell, ComponentLink11Description=https://datasheet.octopart.com:443/CRCW120610K0JNEA-Vishay-datasheet-13242068.pdf?src-supplier=Farnell, ComponentLink11URL=https://datasheet.octopart.com:443/CRCW120610K0JNEA-Vishay-datasheet-13242068.pdf?src-supplier=Farnell, ComponentLink12Description=https://datasheet.octopart.com:443/CRCW120610K0JNEA-Vishay-datasheet-13195083.pdf?src-supplier=Farnell, ComponentLink12URL=https://datasheet.octopart.com:443/CRCW120610K0JNEA-Vishay-datasheet-13195083.pdf?src-supplier=Farnell, ComponentLink13Description=https://datasheet.octopart.com:443/CRCW120610K0JNEA-Vishay-datasheet-13034211.pdf?src-supplier=Farnell, ComponentLink13URL=https://datasheet.octopart.com:443/CRCW120610K0JNEA-Vishay-datasheet-13034211.pdf?src-supplier=Farnell, ComponentLink14Description=https://datasheet.octopart.com:443/CRCW120610K0JNEA-Vishay-datasheet-12600034.pdf?src-supplier=Farnell, ComponentLink14URL=https://datasheet.octopart.com:443/CRCW120610K0JNEA-Vishay-datasheet-12600034.pdf?src-supplier=Farnell, ComponentLink15Description=https://datasheet.octopart.com:443/CRCW120610K0JNEA-Vishay-datasheet-12532161.pdf?src-supplier=Farnell, ComponentLink15URL=https://datasheet.octopart.com:443/CRCW120610K0JNEA-Vishay-datasheet-12532161.pdf?src-supplier=Farnell, ComponentLink16Description=https://datasheet.octopart.com:443/CRCW120610K0JNEA-Vishay-datasheet-12517896.pdf?src-supplier=Farnell, ComponentLink16URL=https://datasheet.octopart.com:443/CRCW120610K0JNEA-Vishay-datasheet-12517896.pdf?src-supplier=Farnell, ComponentLink17Description=https://datasheet.octopart.com:443/CRCW120610K0JNEA-Vishay-datasheet-12509762.pdf?src-supplier=Farnell, ComponentLink17URL=https://datasheet.octopart.com:443/CRCW120610K0JNEA-Vishay-datasheet-12509762.pdf?src-supplier=Farnell, ComponentLink18Description=https://datasheet.octopart.com:443/CRCW120610K0JNEA-Vishay-datasheet-10322335.pdf?src-supplier=Farnell, ComponentLink18URL=https://datasheet.octopart.com:443/CRCW120610K0JNEA-Vishay-datasheet-10322335.pdf?src-supplier=Farnell, ComponentLink19Description=https://datasheet.octopart.com:443/CRCW120610K0JNEA-Vishay-datasheet-8788789.pdf?src-supplier=Farnell, ComponentLink19URL=https://datasheet.octopart.com:443/CRCW120610K0JNEA-Vishay-datasheet-8788789.pdf?src-supplier=Farnell, ComponentLink20Description=https://datasheet.octopart.com:443/CRCW120610K0JNEA-Vishay-datasheet-8361388.pdf?src-supplier=Farnell, ComponentLink20URL=https://datasheet.octopart.com:443/CRCW120610K0JNEA-Vishay-datasheet-8361388.pdf?src-supplier=Farnell, ComponentLink21Description=https://datasheet.octopart.com:443/CRCW120610K0JNEA-Vishay-datasheet-546287.pdf?src-supplier=Farnell, ComponentLink21URL=https://datasheet.octopart.com:443/CRCW120610K0JNEA-Vishay-datasheet-546287.pdf?src-supplier=Farnell, ComponentLink22Description=https://datasheet.octopart.com:443/CRCW120610K0JNEA-Vishay-datasheet-5300368.pdf?src-supplier=Future+Electronics, ComponentLink22URL=https://datasheet.octopart.com:443/CRCW120610K0JNEA-Vishay-datasheet-5300368.pdf?src-supplier=Future+Electronics, ComponentLink23Description=https://datasheet.octopart.com:443/CRCW120610K0JNEA-Vishay-datasheet-62316122.pdf?src-supplier=Future+Electronics, ComponentLink23URL=https://datasheet.octopart.com:443/CRCW120610K0JNEA-Vishay-datasheet-62316122.pdf?src-supplier=Future+Electronics, ComponentLink24Description=https://datasheet.octopart.com:443/CRCW120610K0JNEA-Vishay-datasheet-5306405.pdf?src-supplier=RS+(Formerly+Allied+Electronics), ComponentLink24URL=https://datasheet.octopart.com:443/CRCW120610K0JNEA-Vishay-datasheet-5306405.pdf?src-supplier=RS+(Formerly+Allied+Electronics), ComponentLink25Description=https://datasheet.octopart.com:443/CRCW120610K0JNEA-Vishay-Dale-datasheet-47688880.pdf?src-supplier=RS+(Formerly+Allied+Electronics), ComponentLink25URL=https://datasheet.octopart.com:443/CRCW120610K0JNEA-Vishay-Dale-datasheet-47688880.pdf?src-supplier=RS+(Formerly+Allied+Electronics), ComponentLink26Description=https://datasheet.octopart.com:443/CRCW120610K0JNEA-Vishay-datasheet-12001583.pdf?src-supplier=RS+(Formerly+Allied+Electronics), ComponentLink26URL=https://datasheet.octopart.com:443/CRCW120610K0JNEA-Vishay-datasheet-12001583.pdf?src-supplier=RS+(Formerly+Allied+Electronics), ComponentLink27Description=https://datasheet.octopart.com:443/CRCW120610K0JNEA-Vishay-datasheet-17834126.pdf?src-supplier=TME, ComponentLink27URL=https://datasheet.octopart.com:443/CRCW120610K0JNEA-Vishay-datasheet-17834126.pdf?src-supplier=TME, ComponentLink28Description=https://datasheet.octopart.com/D-CRCW-e3-Standard-Thick-Film-Chip-Resistors-Vishay-datasheet-family-64.pdf, ComponentLink28URL=https://datasheet.octopart.com/D-CRCW-e3-Standard-Thick-Film-Chip-Resistors-Vishay-datasheet-family-64.pdf, ComponentLink29Description=https://datasheet.octopart.com:443/CRCW120610K0JNEA-Vishay-datasheet-8445837.pdf?src-supplier=element14, ComponentLink29URL=https://datasheet.octopart.com:443/CRCW120610K0JNEA-Vishay-datasheet-8445837.pdf?src-supplier=element14, ComponentLink30Description=https://datasheet.octopart.com:443/CRCW120610K0JNEA-Vishay-datasheet-5377184.pdf?src-supplier=Garrett, ComponentLink30URL=https://datasheet.octopart.com:443/CRCW120610K0JNEA-Vishay-datasheet-5377184.pdf?src-supplier=Garrett, ComponentLink31Description=https://datasheet.octopart.com:443/CRCW120610K0JNEA-Vishay-datasheet-148188.pdf?src-supplier=Garrett, ComponentLink31URL=https://datasheet.octopart.com:443/CRCW120610K0JNEA-Vishay-datasheet-148188.pdf?src-supplier=Garrett, ComponentLink32Description=https://datasheet.octopart.com:443/CRCW120610K0JNEA-Vishay-datasheet-41916.pdf?src-supplier=Garrett, ComponentLink32URL=https://datasheet.octopart.com:443/CRCW120610K0JNEA-Vishay-datasheet-41916.pdf?src-supplier=Garrett, ComponentLink33Description=http://sigma.octopart.com:80/rohs_certificate/D-CRCW-e3-Standard-Thick-Film-Chip-Resistors-Vishay-family-102.pdf?src-supplier=Compliance+Statements, ComponentLink33URL=http://sigma.octopart.com:80/rohs_certificate/D-CRCW-e3-Standard-Thick-Film-Chip-Resistors-Vishay-family-102.pdf?src-supplier=Compliance+Statements, ComponentLink34Description=https://datasheet.octopart.com:443/CR1206-JW-103ELF-Bourns-datasheet-159578630.pdf?src-supplier=IHS, ComponentLink34URL=https://datasheet.octopart.com:443/CR1206-JW-103ELF-Bourns-datasheet-159578630.pdf?src-supplier=IHS, ComponentLink35Description=https://datasheet.octopart.com:443/CR1206-JW-103ELF-Bourns-datasheet-181955239.pdf?src-supplier=IHS, ComponentLink35URL=https://datasheet.octopart.com:443/CR1206-JW-103ELF-Bourns-datasheet-181955239.pdf?src-supplier=IHS, ComponentLink36Description=https://datasheet.octopart.com:443/CR1206-JW-103ELF-Bourns-datasheet-68301634.pdf?src-supplier=element14+APAC, ComponentLink36URL=https://datasheet.octopart.com:443/CR1206-JW-103ELF-Bourns-datasheet-68301634.pdf?src-supplier=element14+APAC, ComponentLink37Description=https://datasheet.octopart.com:443/CR1206-JW-103ELF-Bourns-datasheet-49799764.pdf?src-supplier=element14+APAC, ComponentLink37URL=https://datasheet.octopart.com:443/CR1206-JW-103ELF-Bourns-datasheet-49799764.pdf?src-supplier=element14+APAC, ComponentLink38Description=https://datasheet.octopart.com:443/CR1206-JW-103ELF.-Bourns-datasheet-45190937.pdf?src-supplier=element14+APAC, ComponentLink38URL=https://datasheet.octopart.com:443/CR1206-JW-103ELF.-Bourns-datasheet-45190937.pdf?src-supplier=element14+APAC, ComponentLink39Description=https://datasheet.octopart.com:443/CR1206-JW-103ELF.-Bourns-datasheet-62114779.pdf?src-supplier=element14+APAC, ComponentLink39URL=https://datasheet.octopart.com:443/CR1206-JW-103ELF.-Bourns-datasheet-62114779.pdf?src-supplier=element14+APAC, ComponentLink40Description=https://datasheet.octopart.com:443/CR1206-JW-103ELF.-Bourns-datasheet-34229249.pdf?src-supplier=element14+APAC, ComponentLink40URL=https://datasheet.octopart.com:443/CR1206-JW-103ELF.-Bourns-datasheet-34229249.pdf?src-supplier=element14+APAC, ComponentLink41Description=https://datasheet.octopart.com/CR1206-JW-103ELF-Bourns-datasheet-5318152.pdf, ComponentLink41URL=https://datasheet.octopart.com/CR1206-JW-103ELF-Bourns-datasheet-5318152.pdf, ComponentLink42Description=https://datasheet.octopart.com:443/CR1206-JW-103ELF-Bourns-datasheet-154729663.pdf?src-supplier=Electro+Sonic, ComponentLink42URL=https://datasheet.octopart.com:443/CR1206-JW-103ELF-Bourns-datasheet-154729663.pdf?src-supplier=Electro+Sonic, ComponentLink43Description=https://datasheet.octopart.com:443/CR1206-JW-103ELF-Bourns-datasheet-11547086.pdf?src-supplier=Electro+Sonic, ComponentLink43URL=https://datasheet.octopart.com:443/CR1206-JW-103ELF-Bourns-datasheet-11547086.pdf?src-supplier=Electro+Sonic, ComponentLink44Description=https://datasheet.octopart.com:443/CR1206-JW-103ELF-Bourns-datasheet-28808732.pdf?src-supplier=Farnell, ComponentLink44URL=https://datasheet.octopart.com:443/CR1206-JW-103ELF-Bourns-datasheet-28808732.pdf?src-supplier=Farnell, ComponentLink45Description=https://datasheet.octopart.com:443/CR1206-JW-103ELF-Bourns-datasheet-24895818.pdf?src-supplier=Farnell, ComponentLink45URL=https://datasheet.octopart.com:443/CR1206-JW-103ELF-Bourns-datasheet-24895818.pdf?src-supplier=Farnell, ComponentLink46Description=https://datasheet.octopart.com:443/CR1206-JW-103ELF-Bourns-datasheet-22971629.pdf?src-supplier=Farnell, ComponentLink46URL=https://datasheet.octopart.com:443/CR1206-JW-103ELF-Bourns-datasheet-22971629.pdf?src-supplier=Farnell, ComponentLink47Description=https://datasheet.octopart.com:443/CR1206-JW-103ELF.-Bourns-datasheet-41232171.pdf?src-supplier=Farnell, ComponentLink47URL=https://datasheet.octopart.com:443/CR1206-JW-103ELF.-Bourns-datasheet-41232171.pdf?src-supplier=Farnell, ComponentLink48Description=https://datasheet.octopart.com:443/CR1206-JW-103ELF-Bourns-datasheet-137067991.pdf?src-supplier=X-ON, ComponentLink48URL=https://datasheet.octopart.com:443/CR1206-JW-103ELF-Bourns-datasheet-137067991.pdf?src-supplier=X-ON, ComponentLink49Description=https://datasheet.octopart.com:443/CR1206-JW-103ELF-Bourns-datasheet-140567134.pdf?src-supplier=Arrow.cn, ComponentLink49URL=https://datasheet.octopart.com:443/CR1206-JW-103ELF-Bourns-datasheet-140567134.pdf?src-supplier=Arrow.cn, ComponentLink50Description=http://sigma.octopart.com:80/conflict_mineral_statement/Bourns-company-36.pdf?src-supplier=Compliance+Statements, ComponentLink50URL=http://sigma.octopart.com:80/conflict_mineral_statement/Bourns-company-36.pdf?src-supplier=Compliance+Statements, Composition="Thick Film", Contact Plating=Tin, Depth=1.6mm, Features="Moisture Resistant", Height=550µm, Lead Free="Lead Free", Length=3.2mm, Lifecycle Status=Production, Military Standard=Not, Mounting Technology="Surface Mount", Number of Terminals=2, Number of Terminations=2, Packaging="Cut Tape", Pins=2, Power Dissipation=250mW, Power Rating=250mW, Pricing="5000=0,00338 (USD)", Radiation Hardening=No, REACH SVHC=Yes, RoHS=Compliant, Schedule B="8533210045, 8533210045|8533210045|8533210045|8533210045|8533210045|8533210045|8533210045|8533210045|8533210045, 8533210045|8533210045|8533210045|8533210045|8533210045|8533210045|8533210045|8533210045|8533210045|8533210045, 8533210045|8533210045|8533210045|8533210045|8533210045|8533210045|8533210045|8533210045|8533210045|8533210045|8533210045", Stock=700000, Supplier=Avnet, Supplier 1=DigiKey, Supplier Part Number=CRCW120610K0JNEA, Termination=SMD/SMT, Tolerance=5%, Voltage Rating (DC)=200V, Weight=10.007382mg, Width=1.6mm, Working Voltage=200V
R6 R7: library part "RESISTOR - GENERIC", "Res Thin Film 1206 500 Ohm 0.1% 0.125W ±5ppm/°C Molded SMD Paper T/R", .Case/Package=1206, .Tolerance=0.1%, Manufacturer="Stackpole Electronics", Manufacturer Part Number=RNCF1206BKY500R, Max Operating Temperature=155°C, Max Power Dissipation=250mW, Min Operating Temperature=-55°C, Power Rating=125mW, Supplier Part Number 1=738-RNCF1206BKY500RCT-ND, Temperature Coefficient=5ppm/°C, Working Voltage=150V, .Date=050325, Case/Package=1206, Category="Chip SMD Resistors", ComponentLink1Description=https://datasheet.octopart.com:443/RNCF1206BKY500R-Stackpole-Electronics-datasheet-170576579.pdf?src-supplier=IHS, ComponentLink1URL=https://datasheet.octopart.com:443/RNCF1206BKY500R-Stackpole-Electronics-datasheet-170576579.pdf?src-supplier=IHS, ComponentLink2Description=https://datasheet.octopart.com:443/RNCF1206BKY500R-Stackpole-Electronics-datasheet-141158876.pdf?src-supplier=Future+Electronics, ComponentLink2URL=https://datasheet.octopart.com:443/RNCF1206BKY500R-Stackpole-Electronics-datasheet-141158876.pdf?src-supplier=Future+Electronics, ComponentLink3Description=https://datasheet.octopart.com:443/RNCF1206BKY500R-Stackpole-Electronics-datasheet-28504821.pdf?src-supplier=Future+Electronics, ComponentLink3URL=https://datasheet.octopart.com:443/RNCF1206BKY500R-Stackpole-Electronics-datasheet-28504821.pdf?src-supplier=Future+Electronics, ComponentLink4Description=https://datasheet.octopart.com:443/RNCF1206BKY500R-Stackpole-Electronics-datasheet-12511394.pdf?src-supplier=Stackpole+Electronics, ComponentLink4URL=https://datasheet.octopart.com:443/RNCF1206BKY500R-Stackpole-Electronics-datasheet-12511394.pdf?src-supplier=Stackpole+Electronics, ComponentLink5Description=https://datasheet.octopart.com/RNCF1206BKY500R-Stackpole-Electronics-datasheet-11755897.pdf, ComponentLink5URL=https://datasheet.octopart.com/RNCF1206BKY500R-Stackpole-Electronics-datasheet-11755897.pdf, ComponentLink6Description=http://sigma.octopart.com:80/15941409/materials_sheet/Stackpole-Electronics-RNCF1206BKY500R.pdf?src-supplier=Compliance+Statements, ComponentLink6URL=http://sigma.octopart.com:80/15941409/materials_sheet/Stackpole-Electronics-RNCF1206BKY500R.pdf?src-supplier=Compliance+Statements, ComponentLink7Description=http://sigma.octopart.com:80/141158212/rohs_statement/Stackpole-Electronics-RNCF1206BKY500R.pdf?src-supplier=Compliance+Statements, ComponentLink7URL=http://sigma.octopart.com:80/141158212/rohs_statement/Stackpole-Electronics-RNCF1206BKY500R.pdf?src-supplier=Compliance+Statements, ComponentLink8Description=http://sigma.octopart.com:80/141158211/reach_statement/Stackpole-Electronics-RNCF1206BKY500R.pdf?src-supplier=Compliance+Statements, ComponentLink8URL=http://sigma.octopart.com:80/141158211/reach_statement/Stackpole-Electronics-RNCF1206BKY500R.pdf?src-supplier=Compliance+Statements, Composition="Thin Film", Features="Moisture Resistant", Height=550µm, Length=3.2004mm, Lifecycle Status=Production, Mounting Technology="Surface Mount", Number of Terminals=2, Number of Terminations=2, Packaging="Tape & Reel (TR)", Power Dissipation=250mW, Pricing="1000=1.35429, 2000=1.28108, 4000=1.24737, 6000=1.21539, 8000=1.185 (USD)", REACH SVHC=Yes, RoHS=Compliant, Stock=1000, Supplier=Avnet, Supplier 1=DigiKey, Supplier Part Number=RNCF1206BKY500R, Tolerance=0.1%, Width=1.55mm
U1: "Rotary Position Encoder, Single, 2 Channels", Manufacturer=ALPS, Manufacturer Part Number=EC12E24404A6, Max Operating Temperature=70°C, Min Operating Temperature=-10°C, Operating Supply Voltage=5V, Built in Switch=No, Category=Sensors, ComponentLink1Description=https://datasheet.octopart.com:443/EC12E24404A6-ALPS-datasheet-181954823.pdf?src-supplier=IHS, ComponentLink1URL=https://datasheet.octopart.com:443/EC12E24404A6-ALPS-datasheet-181954823.pdf?src-supplier=IHS, ComponentLink2Description=https://datasheet.octopart.com:443/EC12E24404A6-ALPS-datasheet-27704593.pdf?src-supplier=IHS, ComponentLink2URL=https://datasheet.octopart.com:443/EC12E24404A6-ALPS-datasheet-27704593.pdf?src-supplier=IHS, Hole Diameter=2mm, Lifecycle Status=Production, Mounting Technology="Through Hole", Number of Channels=2, Number of Circuits=1, Pricing="1=2,36, 5=2,026, 10=1,898, 25=1,74, 40=1,66425, 80=1,55838, 230=1,40943, 440=1,32475, 945=1,23103 (USD)", Pulses per Revolution=24, Radiation Hardening=No, REACH SVHC=No, RoHS=Compliant, Stock=2128, Supplier=DigiKey, Supplier 1=DigiKey, Supplier Part Number=4809-EC12E24404A6-ND, Supplier Part Number 1=4809-EC12E24404A6-ND, Termination=Solder

## Free pads (board coordinates)
  round 1.605 hole 1.07: CN5-5(95.88,72) CN5-8(95.88,79.62) CN5-9(95.88,82.16) CN5-10(95.88,84.7) CN6-2(47.62,73.02) CN6-8(47.62,57.78) CN8-2(47.62,50.16) CN8-3(47.62,47.62) CN8-4(47.62,45.08) CN8-5(47.62,42.54) CN8-6(47.62,40) CN9-2(95.88,42.54) CN9-3(95.88,45.08) CN9-4(95.88,47.62) CN9-5(95.88,50.16) CN9-6(95.88,52.7) CN9-7(95.88,55.24) CN9-8(95.88,57.78)
  rect 1.605x1.605 / inner round 1.605 / far side rect 1.605x1.605 hole 1.07: CN6-1(47.62,75.56) CN8-1(47.62,52.7) CN9-1(95.88,40)
  round 1.605 hole 1.07 unplated: CN6-3(47.62,70.48)

## Via types
v1: diameter 1.27, hole 0.711, Top Layer to Bottom Layer, 7 vias

## Nets (pads, with @x,y where several pads share a name; then routed paths per layer and width w, separated by ;. In a path a pad name is that pad's centre, name@x,y a point inside that pad or via, vN(x,y) a via of type N, cw(c..) or ccw(c..) an arc to the next point about the centre after c; other vN are vias at no path point)
+3.3_MCU: B1.2 PH1.1 R2.2 R3.2 | length 92.9
  Top Layer w0.6: PH1.1 45.53,65.85 45.53,56.67 46.175,56.025 51.425,56.025 54.35,53.1 ; R3.2@72.7,39.125 R3.2 72.725,37.626 72.374,37.275 54.925,37.275 53.525,38.675 53.525,52.275 54.35,53.1 ; R2.2 72.91,51.956 72.915,51.961 72.915,52.459 72.274,53.1 ; B1.2 75.325,63.775 74.475,62.925 74.475,55.301 72.274,53.1 ; 54.35,53.1 72.274,53.1
+5_USB: C3.2 C4.1 IC1.10 IC1.13 IC1.14 LED1.4 PH1.2 | length 37.3
  Top Layer w0.6: PH1.2 49.925,65.4 51.825,67.3 ; C4.1 53.075,70.725 51.825,69.475 51.825,67.3 ; C4.1@55.376,70.726 IC1.14 IC1.13 53.876,74.45 53.525,74.801 53.525,77.899 53.876,78.25 54.941,78.25 54.951,78.26 IC1.10 ; LED1.4@62.1,64.384 C3.2 57.4,61.725 51.825,67.3
ACH_MCU: C1.2 PH5.2 R5.1 | length 33.9
  Top Layer w0.6: R5.1@82.2,39.125 C1.2 ; R5.1 84.675,39.1 87.05,41.475 87.05,51.45 92.8,57.2 92.8,60.6 94.04,61.84 PH5.2
BCH_MCU: C2.2 PH5.1 R4.1 | length 27.2
  Top Layer w0.254: C2.2@82.15,48.325 C2.2
  Top Layer w0.6: C2.2@82.15,48.325 R4.1 82.15,56.3 83.2,57.35 89.75,57.35 91.35,58.95 91.35,62.625 93.105,64.38 PH5.1
CIN_LED: LED1.2 R6.1 | length 3
  Top Layer w0.6: R6.1@63.7,72.8 63.7,69.82 LED1.2
CIN_MCU: IC1.2 PH2.2 | length 53
  Top Layer w0.6: IC1.2 59.525,74.45 57.775,76.2 57.775,82.7 59.275,84.2 86.22,84.2 PH2.2
CIN_OUT: IC1.3 R6.2 | length 2.9
  Top Layer w0.254: R6.2@63.67,75.72 R6.2@63.7,75.75
  Top Layer w0.6: IC1.3 R6.2@63.67,75.72
COUT: LED1.5 R9.2 | length 8.7
  Top Layer w0.6: LED1.5 63.718,59.482 65.496,57.704 R9.2
DIN_LED: LED1.1 R7.1 | length 5.3
  Top Layer w0.6: LED1.1 66.827,69.802 68.15,71.125 R7.1
DIN_MCU: IC1.5 PH4.1 | length 47.8
  Top Layer w0.6: IC1.5 59.74,78.26 59.1,78.9 59.1,81.875 60.225,83 82.34,83 PH4.1
DIN_OUT: IC1.6 R7.2 | length 10.4
  Top Layer w0.6: IC1.6 67.095,79.53 68.15,78.475 R7.2
DOUT: LED1.6 R8.2 | length 4.1
  Top Layer w0.6: LED1.6 65.318,62.301 R8.2
ENCODER_CHA: R3.1 R5.2 U1.1 | length 13.7
  Top Layer w0.6: U1.1 76.621,42.629 77.4,41.85 77.4,40.75 ; R3.1@75.8,39.125 75.8,39.15 77.4,40.75 ; R5.2 77.475,40.75 77.4,40.75
ENCODER_CHB: R2.1 R4.2 U1.3 | length 14
  Top Layer w0.6: U1.3 76.679,47.629 77.269,48.219 77.269,49.344 ; R2.1 76.295,51.025 76.295,50.318 77.269,49.344 ; R4.2 79.05,50.675 78.765,50.39 78.465,50.39 77.419,49.344 77.269,49.344
GND: C1.1 C2.1 C3.1 C4.2 IC1.1 IC1.4 IC1.7 IC1.9 IC1.12 LED1.3 PH2.1 PH3.1 PH3.2 R1.2 R8.1 R9.1 U1.2 | length 53.3
  Top Layer w0.6: IC1.12 56.47,75.72 ; IC1.9 56.345,79.53 56.675,79.2 56.675,75.925 56.47,75.72 ; C4.2 56.907,70.725 59.362,73.18 ; IC1.1 59.362,73.18 ; IC1.4 62.414,76.99 63.35,77.926 v1(63.35,77.95) ; IC1.7 62.375,80.8 v1(63.25,81.675) ; C3.1 62.1,57.2 v1(62.125,57.175) ; U1.2 76.396,45.129 v1(76.475,45.05) 81.45,45.05 ; R9.1@69.807,57.736 69.84,57.769 69.84,61.149 69.825,61.164 69.832,61.172 69.832,62.993 v1(69.825,63) ; C2.1 82.175,45.775 81.45,45.05 ; C1.1 82.2,44.3 81.45,45.05 ; 56.47,75.72 57.497,74.693 57.497,73.878 v1(57.575,73.8) 58.742,73.8 59.362,73.18
  Top Layer w0.7: LED1.3 v1@62.118,67.178 ; v1(69.825,63) 69.825,64.75 71.05,65.975 R1.2 ; v1@62.118,67.178 62.118,67.102 v1(62.194,67.102) v1@62.118,67.178
P1_NO_MCU: B1.1 PH4.2 R1.1 | length 29
  Top Layer w0.6: B1.1 R1.1 74.25,66.375 74.25,68.3 75.825,69.875 92.925,69.875 PH4.2
pads on no net: B1. B1.3 B1.4 B1.5 B1.6 IC1.8 IC1.11 U1.

## Polygon pours and split planes (outlines as drawn)
GND on Bottom Layer "GND_L02_P000" (solid, pour order 0): 36,89 36,37 107,37 107,89

## Text inside footprints (layer, text, board x,y; h text height)
B1: Top 3D Body "1" at 79.2,65.85 h1
IC1: Top 3D Body "1" at 59.851,73.365 h0.5 r180
LED1: Top 3D Body "1" at 65.064,68.452 h0.6 r270
U1: Top 3D Body "1" at 68.518,41.475 h1.52 r180